# EAGLE board espcam (EAGLE 9.6.2)
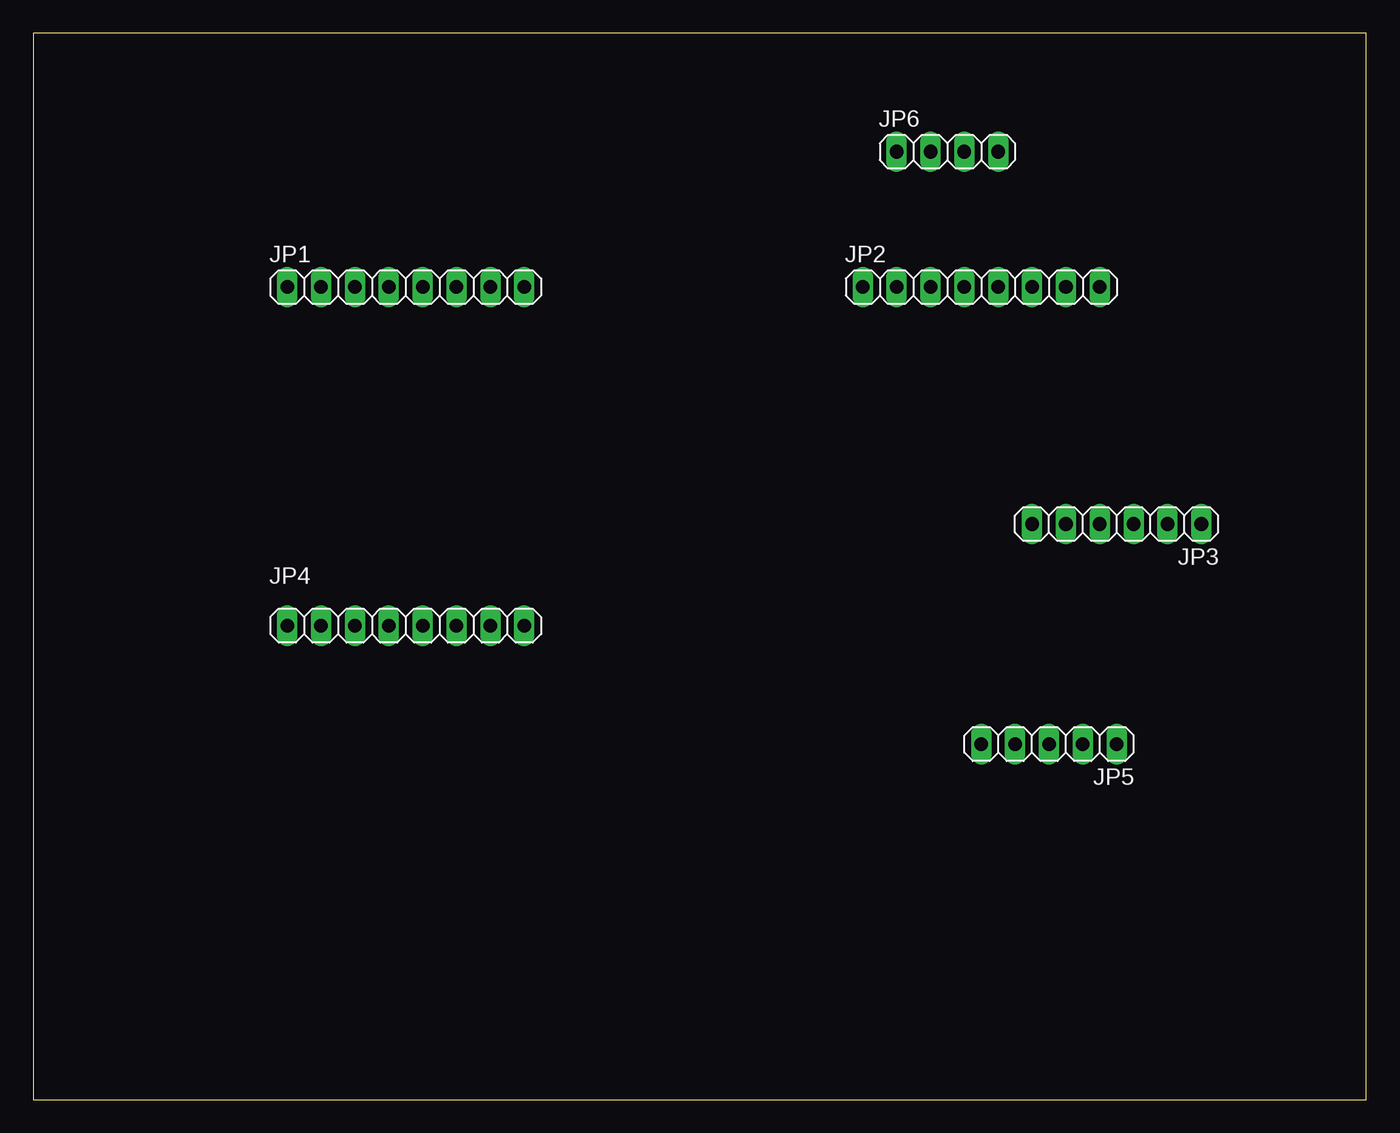
[diagram p0: board, top side]
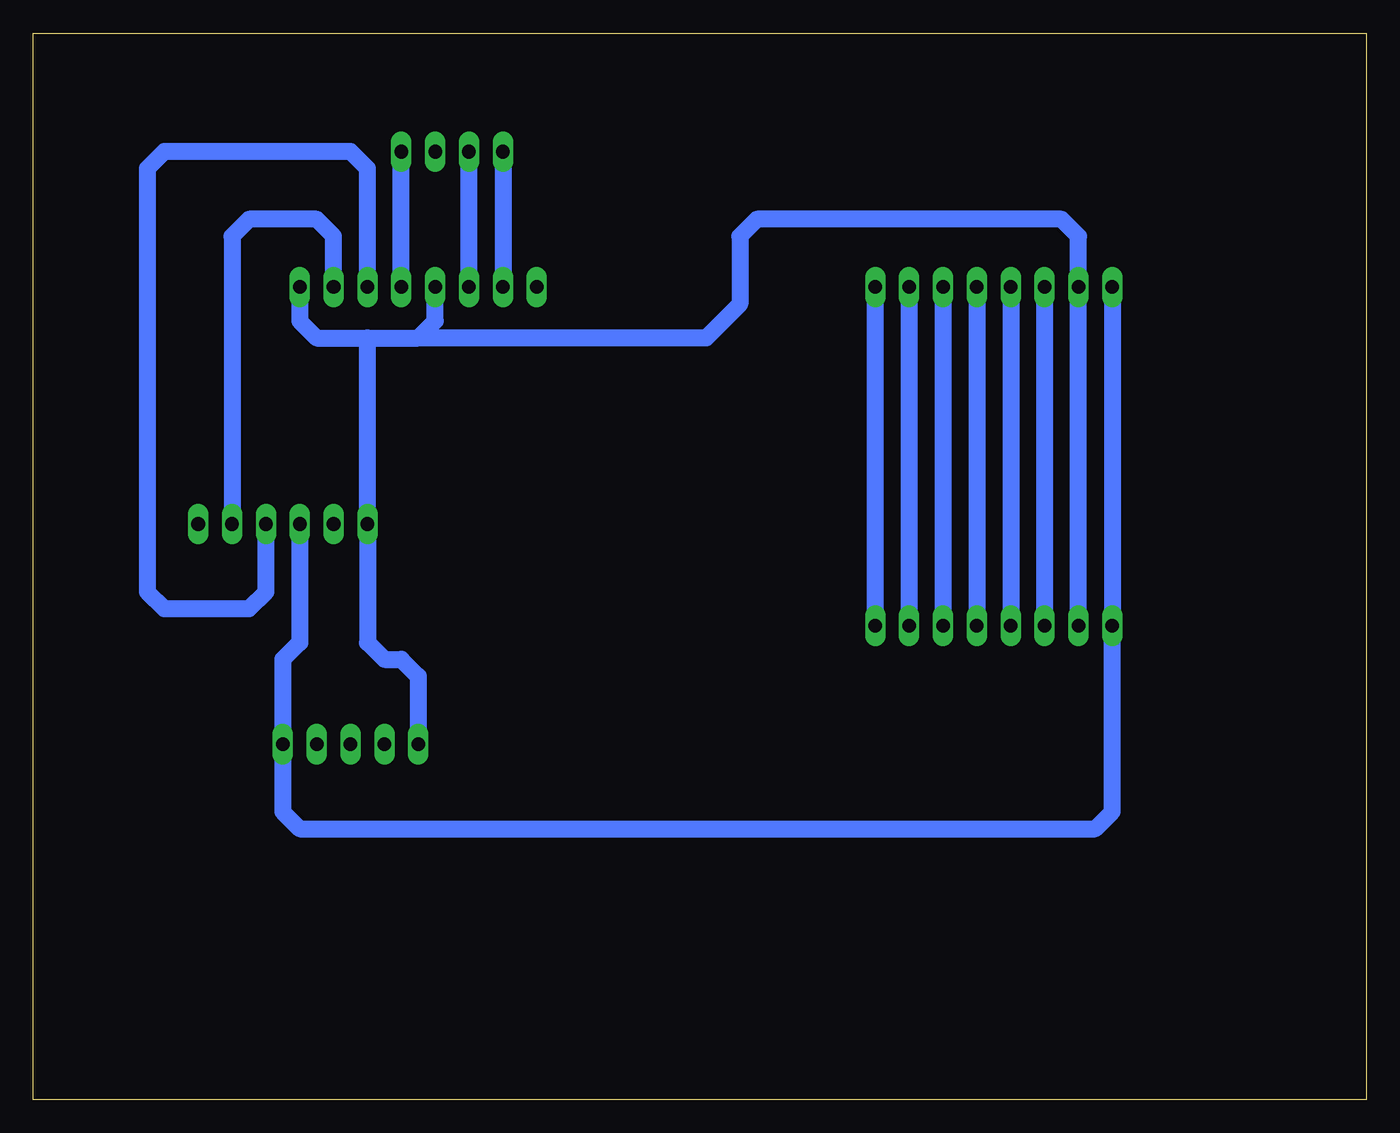
[diagram p1: board, bottom side, seen from below]

Size 100 x 80 mm. Coordinates in mm from the lower left corner, seen from the top.
Outline: 0,0 100,0 100,80 0,80 0,0
Copper layers (1*16): Top 0.035mm / dielectric 1.5mm / Bottom 0.035mm
Design rules "default": minimum track width 6mil, minimum drill 0.35mm, track to track 6mil, track to pad 6mil, pad to pad 6mil, via to via 6mil, smd to smd 6mil, copper to edge 40mil, drill to drill 6mil, minimum pad ring 10mil, minimum via ring 8mil, stop-mask expansion 4mil, vias tented up to drill 0mil, thermal gap 10mil

## Footprints (pad centres in the part's own frame; a part is rotated, then mirrored left to right if it is on the bottom)
1X08 = drill 1.016 long: 1 -8.89,0; 2 -6.35,0; 3 -3.81,0; 4 -1.27,0; 5 1.27,0; 6 3.81,0; 7 6.35,0; 8 8.89,0
1X06 = drill 1.016 long: 1 -6.35,0; 2 -3.81,0; 3 -1.27,0; 4 1.27,0; 5 3.81,0; 6 6.35,0
1X05 = drill 1.016 long: 1 -5.08,0; 2 -2.54,0; 3 0,0; 4 2.54,0; 5 5.08,0
1X04 = drill 1.016 long: 1 -3.81,0; 2 -1.27,0; 3 1.27,0; 4 3.81,0

## Placement (x,y rotation side)
JP1  [1X08]  27.94,60.96 0 top
JP2  [1X08]  71.12,60.96 0 top
JP3  [1X06]  81.28,43.18 180 top
JP4  [1X08]  27.94,35.56 0 top
JP5  [1X05]  76.2,26.67 180 top
JP6  [1X04]  68.58,71.12 0 top

## Library data of the parts
JP1-JP6 = pinhead

## Nets
3V3: JP2.1
5V: JP1.1 JP3.4 JP4.1 JP5.1
GND: JP1.2 JP2.4 JP2.8 JP3.6 JP4.2 JP5.5
IO0: JP2.3 JP6.2
IO2: JP1.7 JP4.7
IO4: JP1.8 JP4.8
IO12: JP1.3 JP4.3
IO13: JP1.4 JP4.4
IO14: JP1.6 JP4.6
IO15: JP1.5 JP4.5
IO16: JP2.2 JP6.1
N$1: JP6.3
RX: JP2.7 JP3.2
TX: JP2.6 JP3.3
VOUT: JP2.5 JP6.4

## Tracks (layer width: path | path; a pad name or v marks a point on that pad's centre or on a via)
5V
  Bottom 1.27: JP3.4 80.01,34.29 81.28,33.02 JP5.1 81.28,21.59 80.01,20.32 20.32,20.32 19.05,21.59 JP4.1 JP1.1
GND
  Bottom 1.27: JP3.6 74.78,43.03 | JP3.6 74.93,34.29 73.66,33.02 72.39,33.02 71.12,31.75 JP5.5 | JP4.2 JP1.2 21.59,64.77 22.86,66.04 45.72,66.04 46.99,64.77 46.99,59.69 49.53,57.15 71.12,57.15 | JP2.8 80.01,58.42 78.74,57.15 74.93,57.15 | 74.93,57.15 71.12,57.15 | 71.12,57.15 69.85,58.42 JP2.4 | JP3.6 74.93,57.15
IO0
  Bottom 1.27: JP2.3 JP6.2
IO2
  Bottom 1.27: JP1.7 JP4.7
IO4
  Bottom 1.27: JP4.8 JP1.8
IO12
  Bottom 1.27: JP1.3 JP4.3
IO13
  Bottom 1.27: JP1.4 JP4.4
IO14
  Bottom 1.27: JP1.6 JP4.6
IO15
  Bottom 1.27: JP1.5 JP4.5
IO16
  Bottom 1.27: JP6.1 JP2.2
RX
  Bottom 1.27: JP2.7 77.47,64.77 78.74,66.04 83.82,66.04 85.09,64.77 JP3.2
TX
  Bottom 1.27: JP2.6 74.93,69.85 76.2,71.12 90.17,71.12 91.44,69.85 91.44,38.1 90.17,36.83 83.82,36.83 82.55,38.1 JP3.3
VOUT
  Bottom 1.27: JP2.5 JP6.4